# Altium PCB PCB_LC_LPF-16-25.PcbDoc
Units mm, origin at the board's own origin, x right, y up, seen from the top; angles counter-clockwise.
Board outline 180 x 65 mm, 2 copper layers (Top Layer, Bottom Layer); 40 components, 21 nets, 80 pads, 10 vias.
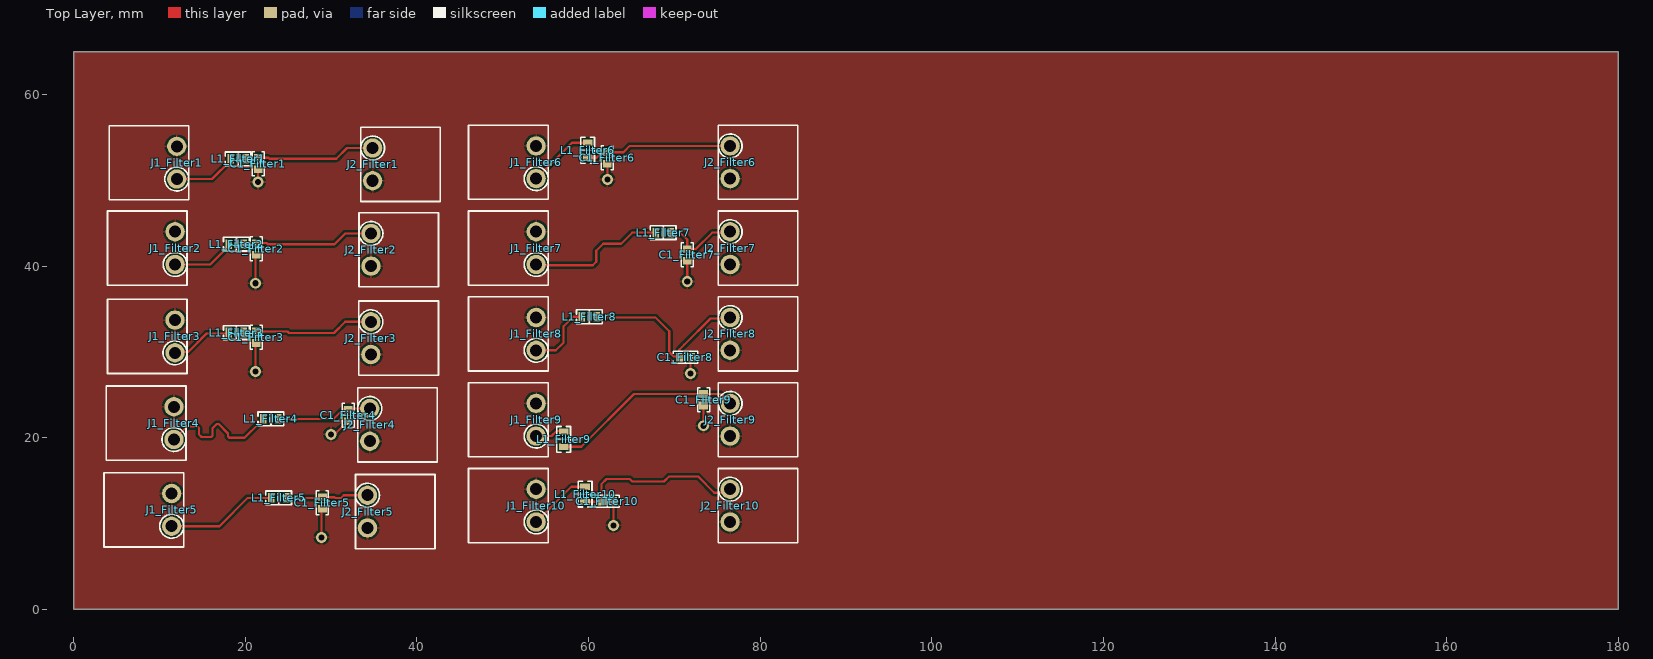
[diagram p0: Top Layer view]
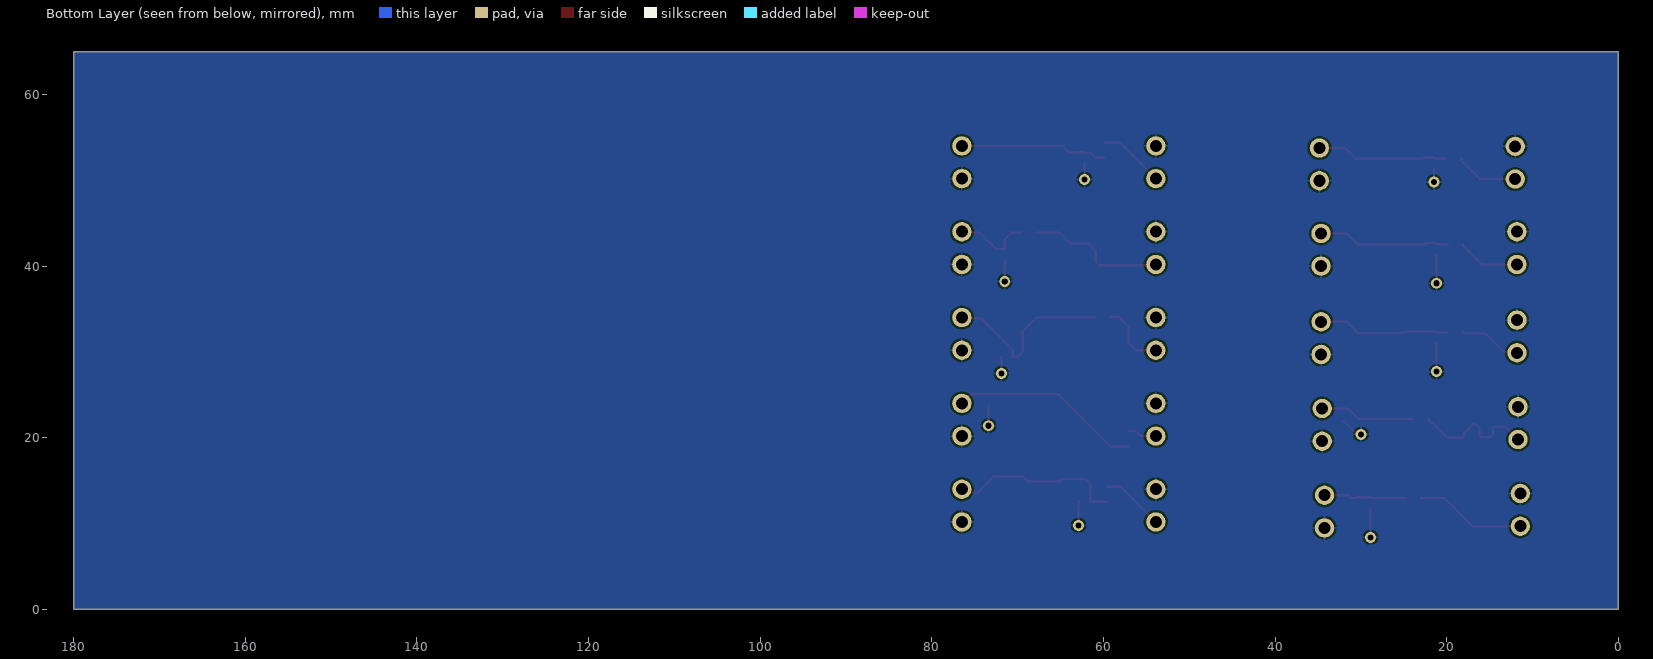
[diagram p1: Bottom Layer view, seen from below]
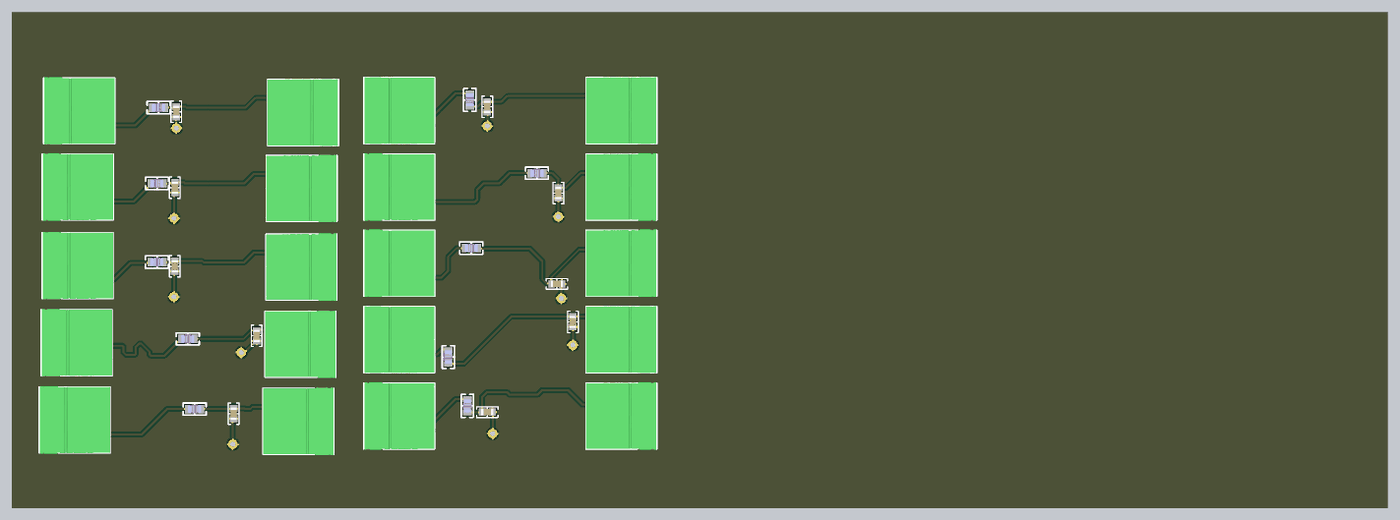
[diagram p2: 3D render of the assembled board from above, using the file's embedded part models]

## Layer stack, top to bottom
Top Solder: solder mask 0.0102, Solder Resist, Dk 3.5
Top Layer: signal copper 0.0356
Dielectric 1: dielectric 0.32, FR-4, Dk 4.8
Bottom Layer: signal copper 0.0356
Bottom Solder: solder mask 0.0102, Solder Resist, Dk 3.5

## Board outline
0,0 180,0 180,65 0,65

## Design rules (kind name [scope] priority, off if disabled: settings)
Clearance [All] p1: gap=0.254 ignorepadtopadclearanceinfootprint=FALSE except(0: Arc-Hole Track-Hole SMDPad-Hole THPad-Hole Via-Hole Fill-Hole Poly-Hole Region-Hole Text-Hole)
PolygonConnect [All] p1: connectstyle=Relief reliefconductorwidth=0.254 reliefentries=4 polygonreliefangle="90 Angle" airgapwidth=0.254
RoutingVias [All] p1: holewidth=0.711 width=1.27 viastyle="Through Hole" minholewidth=0.711 minwidth=1.27 maxholewidth=0.711 maxwidth=1.27
SolderMaskExpansion [All] p1: expansion=0.102 istentingtop=FALSE
Width [All] p1: maxlimit=0.254 minlimit=0.254 preferedwidth=0.254
30 further rules are at their usual default settings.

## Classes and differential pairs
component class Filter10: C1_Filter10 J1_Filter10 J2_Filter10 L1_Filter10
component class Filter9: C1_Filter9 J1_Filter9 J2_Filter9 L1_Filter9
component class Filter8: C1_Filter8 J1_Filter8 J2_Filter8 L1_Filter8
component class Filter7: C1_Filter7 J1_Filter7 J2_Filter7 L1_Filter7
component class Filter6: C1_Filter6 J1_Filter6 J2_Filter6 L1_Filter6
channel class PCB_LC_LPF-16-20: Filter1 Filter2 Filter3 Filter4 Filter5 Filter6 Filter7 Filter8 Filter9 Filter10
component class Filter5: C1_Filter5 J1_Filter5 J2_Filter5 L1_Filter5
component class Filter4: C1_Filter4 J1_Filter4 J2_Filter4 L1_Filter4
component class Filter3: C1_Filter3 J1_Filter3 J2_Filter3 L1_Filter3
component class Filter2: C1_Filter2 J1_Filter2 J2_Filter2 L1_Filter2
component class Filter1: C1_Filter1 J1_Filter1 J2_Filter1 L1_Filter1

## Components (designator, comment, footprint, x,y, rotation, side; value= is the part's Value field where it differs from the comment)
C1_Filter1 "10 µF" "CAP 0603_1608" 21.5,51.95 r90 top (schematic designator C1)
C1_Filter2 "10 µF" "CAP 0603_1608" 21.305,42.002 r90 top (schematic designator C1)
C1_Filter3 "10 µF" "CAP 0603_1608" 21.293,31.706 r90 top (schematic designator C1)
C1_Filter4 "10 µF" "CAP 0603_1608" 32,22.6 r90 top (schematic designator C1)
C1_Filter5 "10 µF" "CAP 0603_1608" 29.005,12.402 r90 top (schematic designator C1)
C1_Filter6 "10 µF" "CAP 0603_1608" 62.2,52.6 r90 top (schematic designator C1)
C1_Filter7 "10 µF" "CAP 0603_1608" 71.5,41.3 r90 top (schematic designator C1)
C1_Filter8 "10 µF" "CAP 0603_1608" 71.3,29.4 r180 top (schematic designator C1)
C1_Filter9 "10 µF" "CAP 0603_1608" 73.4,24.425 r90 top (schematic designator C1)
C1_Filter10 "10 µF" "CAP 0603_1608" 62.2,12.6 r180 top (schematic designator C1)
J1_Filter1 "OQ0232510000G" "FCI 06-381-2PIN" 8.726,52.049 r90 top (schematic designator J1)
J1_Filter2 "OQ0232510000G" "FCI 06-381-2PIN" 8.531,42.101 r90 top (schematic designator J1)
J1_Filter3 "OQ0232510000G" "FCI 06-381-2PIN" 8.519,31.805 r90 top (schematic designator J1)
J1_Filter4 "OQ0232510000G" "FCI 06-381-2PIN" 8.394,21.705 r90 top (schematic designator J1)
J1_Filter5 "OQ0232510000G" "FCI 06-381-2PIN" 8.131,11.601 r90 top (schematic designator J1)
J1_Filter6 "OQ0232510000G" "FCI 06-381-2PIN" 50.6,52.1 r90 top (schematic designator J1)
J1_Filter7 "OQ0232510000G" "FCI 06-381-2PIN" 50.6,42.1 r90 top (schematic designator J1)
J1_Filter8 "OQ0232510000G" "FCI 06-381-2PIN" 50.6,32.1 r90 top (schematic designator J1)
J1_Filter9 "OQ0232510000G" "FCI 06-381-2PIN" 50.6,22.1 r90 top (schematic designator J1)
J1_Filter10 "OQ0232510000G" "FCI 06-381-2PIN" 50.6,12.1 r90 top (schematic designator J1)
J2_Filter1 "OQ0232510000G" "FCI 06-381-2PIN" 38.15,51.85 r270 top (schematic designator J2)
J2_Filter2 "OQ0232510000G" "FCI 06-381-2PIN" 37.955,41.902 r270 top (schematic designator J2)
J2_Filter3 "OQ0232510000G" "FCI 06-381-2PIN" 37.943,31.606 r270 top (schematic designator J2)
J2_Filter4 "OQ0232510000G" "FCI 06-381-2PIN" 37.818,21.506 r270 top (schematic designator J2)
J2_Filter5 "OQ0232510000G" "FCI 06-381-2PIN" 37.555,11.402 r270 top (schematic designator J2)
J2_Filter6 "OQ0232510000G" "FCI 06-381-2PIN" 79.8,52.1 r270 top (schematic designator J2)
J2_Filter7 "OQ0232510000G" "FCI 06-381-2PIN" 79.8,42.1 r270 top (schematic designator J2)
J2_Filter8 "OQ0232510000G" "FCI 06-381-2PIN" 79.8,32.1 r270 top (schematic designator J2)
J2_Filter9 "OQ0232510000G" "FCI 06-381-2PIN" 79.8,22.1 r270 top (schematic designator J2)
J2_Filter10 "OQ0232510000G" "FCI 06-381-2PIN" 79.8,12.1 r270 top (schematic designator J2)
L1_Filter1 "47µH" "IND 0603_1608 RF WW" 19.175,52.5 r180 top (schematic designator L1)
L1_Filter2 "47µH" "IND 0603_1608 RF WW" 18.98,42.552 r180 top (schematic designator L1)
L1_Filter3 "47µH" "IND 0603_1608 RF WW" 18.968,32.256 r180 top (schematic designator L1)
L1_Filter4 "47µH" "IND 0603_1608 RF WW" 23,22.2 r180 top (schematic designator L1)
L1_Filter5 "47µH" "IND 0603_1608 RF WW" 23.9,13 r180 top (schematic designator L1)
L1_Filter6 "47µH" "IND 0603_1608 RF WW" 59.9,53.5 r90 top (schematic designator L1)
L1_Filter7 "47µH" "IND 0603_1608 RF WW" 68.7,43.9 r180 top (schematic designator L1)
L1_Filter8 "47µH" "IND 0603_1608 RF WW" 60.1,34.1 r180 top (schematic designator L1)
L1_Filter9 "47µH" "IND 0603_1608 RF WW" 57.1,19.825 r90 top (schematic designator L1)
L1_Filter10 "47µH" "IND 0603_1608 RF WW" 59.6,13.425 r90 top (schematic designator L1)

## Footprints (in the part's own frame and the unit in brackets; to place one, negate y for a bottom-side part, rotate by r counter-clockwise, add the part's x,y. Pads: shape width x height; smd on the part's side, far side on the other; paste and mask are expansions set on the pad)
"CAP 0603_1608" [mm] "Chip Capacitor, 2-Leads, Body 1.60x0.80mm, IPC Medium Density"
  rect 0.9x1 smd: 1(-0.675,0) 2(0.675,0)
  silkscreen extent -1.4,-0.7 1.4,0.7, body extent -0.8,-0.41 0.8,0.41, height 0.82
"FCI 06-381-2PIN" [mm] "FCI Pluggable Terminal Block"
  round 2.25 hole 1.4: 1(-1.905,-3.302) 2(1.905,-3.302)
  silkscreen extent -4.32,-4.7 4.32,4.57, body extent -4.4,-4.7 4.4,4.5, height 7.6
"IND 0603_1608 RF WW" [mm] "Chip Inductor, 2-Leads, Body 1.65x0.99mm, IPC Medium Density"
  rect 0.76x1.13 smd: 1(-0.875,0) 2(0.875,0)
  silkscreen extent -1.5,-0.8 1.5,0.8, body extent -0.84,-0.58 0.83,0.58, height 1

## Part data
C1_Filter1 C1_Filter2 C1_Filter3 C1_Filter4 C1_Filter5 C1_Filter6 C1_Filter7 C1_Filter8 C1_Filter9 C1_Filter10: library part MD0603BW106M100NHT-EM, "CAP CER 10UF 10V X5R 0603", Device Package="0603 (1608 Metric)", Manufacturer="Knowles Novacap", Operating Temperature="-55°C ~ 85°C", Supplier Part Number 1=1763-MD0603BW106M100NHT-EMCT-ND, Temperature Coefficient=X5R, Tolerance=±20%, Voltage - Rated=10V, Applications="Medical, Non-Critical", Capacitance="10 µF", ComponentLink1Description=Datasheet, ComponentLink1URL="https://mm.digikey.com/Volume0/opasdata/d220001/medias/docus/5546/MD Series R3.pdf", ComponentLink2Description="DigiKey Link", ComponentLink2URL=https://www.digikey.com/en/products/detail/knowles-novacap/MD0603BW106M100NHT-EM/21406876, lastupdated="02/11/2023 19:09:18", Lifecycle Status=Active, Minimum Order=1, Mounting Type="Surface Mount, MLCC", Package / Case="0603 (1608 Metric)", Packaging=TapeAndReel, Part Number=MD0603BW106M100NHT-EM, PartId=56748, price=0.24, Series=MD, Supplier 1=DigiKey
J1_Filter1 J1_Filter2 J1_Filter3 J1_Filter4 J1_Filter5 J1_Filter6 J1_Filter7 J1_Filter8 J1_Filter9 J1_Filter10 J2_Filter1 J2_Filter2 J2_Filter3 J2_Filter4 J2_Filter5 J2_Filter6 J2_Filter7 J2_Filter8 J2_Filter9 J2_Filter10: "TERM BLOCK HDR 2POS 90DEG 3.81MM", Color=Green, Current - UL=10A, Manufacturer="Amphenol Anytek", Operating Temperature="-40°C ~ 115°C", Supplier Part Number 1=609-3819-ND, Voltage - UL=300V, ComponentLink1Description=Datasheet, ComponentLink1URL=http://portal.fciconnect.com/Comergent//fci/drawing/oqxx32x100j0g.pdf, ComponentLink2Description="DigiKey Link", ComponentLink2URL=//digikey.com/product-detail/en/amphenol-anytek/OQ0232510000G/609-3819-ND/2261255, Contact Mating Finish=Tin, Header Orientation="90°, Right Angle", lastupdated="16/12/2019 19:14:30", Lifecycle Status=0, Minimum Order=1, Mounting Type="Through Hole", Number of Levels=1, Number of Positions=2, Packaging=Bulk, Part Number=OQ0232510000G, Part Status=Active, Pitch="0.150\" (3.81mm)", Positions Per Level=2, price=0.49, Series=06-381, Supplier 1=DigiKey, Termination Style=Solder, Type="Header, Male Pins, Shrouded (4 Side)"
L1_Filter1 L1_Filter2 L1_Filter3 L1_Filter4 L1_Filter5 L1_Filter6 L1_Filter7 L1_Filter8 L1_Filter9 L1_Filter10: library part L0603B470MPWFT, "INDUCTORPOWER LINE 0603 47H 20%", Current Rating (Amps)=90mA, DC Resistance (DCR)=5.8Ohm, Device Package="0603 (1608 Metric)", Frequency - Self Resonant=11MHz, Inductance Frequency - Test=2.52MHz, Manufacturer=KEMET, Operating Temperature="-40°C ~ 105°C", Supplier Part Number 1=399-17776-1-ND, Tolerance=±20%, ComponentLink1Description=Datasheet, ComponentLink1URL=https://api.kemet.com/component-edge/download/datasheet/L0603B470MPWFT.pdf, ComponentLink2Description="DigiKey Link", ComponentLink2URL=http://digikey.com/product-detail/en/kemet/L0603B470MPWFT/399-17776-1-ND/8601439, Height - Seated (Max)="0.035\" (0.90mm)", Inductance=47µH, lastupdated="06/09/2020 11:05:20", Lifecycle Status=Active, Material - Core=Ferrite, Minimum Order=1, Mounting Type="Surface Mount", Package / Case="0603 (1608 Metric)", Packaging=TapeAndReel, Part Number=L0603B470MPWFT, Part Status=Active, PartId=1309, price=0.14, Series=L-PWF, Shielding=Unshielded, Size / Dimension="0.063\" L x 0.031\" W (1.60mm x 0.80mm)", Supplier 1=DigiKey, Supplier Device Package="0603 (1608 Metric)", Type=Wirewound

## Via types
v1: diameter 1.27, hole 0.711, Top Layer to Bottom Layer, 10 vias

## Nets (pads, with @x,y where several pads share a name; then routed paths per layer and width w, separated by ;. In a path a pad name is that pad's centre, name@x,y a point inside that pad or via, vN(x,y) a via of type N, cw(c..) or ccw(c..) an arc to the next point about the centre after c; other vN are vias at no path point)
GND: C1_Filter1.1 C1_Filter2.1 C1_Filter3.1 C1_Filter4.1 C1_Filter5.1 C1_Filter6.1 C1_Filter7.1 C1_Filter8.1 C1_Filter9.1 C1_Filter10.1 J1_Filter1.2 J1_Filter2.2 J1_Filter3.2 J1_Filter4.2 J1_Filter5.2 J1_Filter6.2 J1_Filter7.2 J1_Filter8.2 J1_Filter9.2 J1_Filter10.2 J2_Filter1.2 J2_Filter2.2 J2_Filter3.2 J2_Filter4.2 J2_Filter5.2 J2_Filter6.2 J2_Filter7.2 J2_Filter8.2 J2_Filter9.2 J2_Filter10.2 | length 25.6
  Top Layer w0.254: v1(21.188,27.704) 21.188,30.926 C1_Filter3.1 ; v1(21.2,38) 21.2,41.222 C1_Filter2.1 ; v1(21.5,49.8) C1_Filter1.1 ; v1(28.9,8.4) 28.9,11.622 C1_Filter5.1 ; v1(30,20.4) 30.194,20.594 30.619,20.594 31.95,21.925 C1_Filter4.1 ; v1(62.2,50.1) C1_Filter6.1 ; C1_Filter10.1 62.9,12.575 v1(62.9,9.8) ; v1(71.5,38.2) C1_Filter7.1 ; v1(71.9,27.5) 71.9,29.325 C1_Filter8.1 ; v1(73.4,21.4) C1_Filter9.1
IN_Filter1: J1_Filter1.1 L1_Filter1.2 | length 7.4
  Top Layer w0.254: J1_Filter1.1 16.129,50.144 18.3,52.315 L1_Filter1.2
IN_Filter2: J1_Filter2.1 L1_Filter2.2 | length 7.4
  Top Layer w0.254: J1_Filter2.1 15.934,40.196 18.105,42.367 L1_Filter2.2
IN_Filter3: J1_Filter3.1 L1_Filter3.2 | length 7.2
  Top Layer w0.254: J1_Filter3.1 11.898,29.977 13.327,29.977 15.5,32.15 17.987,32.15 L1_Filter3.2
IN_Filter4: J1_Filter4.1 L1_Filter4.2 | length 15
  Top Layer w0.254: J1_Filter4.1 13.196,21.3 14.451,21.3 14.6,21.151 14.6,20.4 14.9,20.1 16.051,20.1 16.2,20.249 16.2,21.1 16.695,21.595 16.905,21.595 18,20.5 18,20.149 18.149,20 19.925,20 21.687,21.762 21.872,21.762 22.125,22.015 L1_Filter4.2
IN_Filter5: J1_Filter5.1 L1_Filter5.2 | length 13.1
  Top Layer w0.254: J1_Filter5.1 16.996,9.696 20.3,13 L1_Filter5.2 L1_Filter5.2@23.025,13.185
IN_Filter6: J1_Filter6.1 L1_Filter6.2 | length 7.7
  Top Layer w0.254: J1_Filter6.1 56.1,52.393 56.1,52.4 58.075,54.375 L1_Filter6.2
IN_Filter7: J1_Filter7.1 L1_Filter7.2 | length 16.3
  Top Layer w0.254: J1_Filter7.1 53.997,40.1 60.5,40.1 60.9,40.5 60.9,41.8 61.7,42.6 63.8,42.6 65.1,43.9 L1_Filter7.2
IN_Filter8: J1_Filter8.1 L1_Filter8.2 | length 8.1
  Top Layer w0.254: J1_Filter8.1 56.195,30.195 57.1,31.1 57.1,33 58.2,34.1 L1_Filter8.2
IN_Filter9: J1_Filter9.1 L1_Filter9.2 | length 3.5
  Top Layer w0.254: J1_Filter9.1 55.695,20.195 56.303,20.803 56.997,20.803 L1_Filter9.2
IN_Filter10: J1_Filter10.1 L1_Filter10.2 | length 7.4
  Top Layer w0.254: J1_Filter10.1 58.007,14.3 L1_Filter10.2
OUT_Filter1: C1_Filter1.2 J2_Filter1.1 L1_Filter1.1 | length 15.4
  Top Layer w0.254: L1_Filter1.1 21.375,52.5 C1_Filter1.2 22.7,52.625 22.825,52.5 30.6,52.5 31.855,53.755 J2_Filter1.1
OUT_Filter2: C1_Filter2.2 J2_Filter2.1 L1_Filter2.1 | length 15.4
  Top Layer w0.254: L1_Filter2.1 21.18,42.552 C1_Filter2.2 22.505,42.677 22.63,42.552 30.405,42.552 31.66,43.807 J2_Filter2.1
OUT_Filter3: C1_Filter3.2 J2_Filter3.1 L1_Filter3.1 | length 15.5
  Top Layer w0.254: L1_Filter3.1 21.168,32.256 C1_Filter3.2 24.919,32.381 25.1,32.2 30.337,32.2 31.648,33.511 J2_Filter3.1
OUT_Filter4: C1_Filter4.2 J2_Filter4.1 L1_Filter4.1 | length 11.1
  Top Layer w0.254: L1_Filter4.1 30.312,22.2 31.523,23.411 J2_Filter4.1
OUT_Filter5: C1_Filter5.2 J2_Filter5.1 L1_Filter5.1 | length 9.7
  Top Layer w0.254: L1_Filter5.1 28.928,13 C1_Filter5.2 30.423,13.077 30.5,13 31.175,13 31.482,13.307 J2_Filter5.1
OUT_Filter6: C1_Filter6.2 J2_Filter6.1 L1_Filter6.1 | length 17.2
  Top Layer w0.254: L1_Filter6.1 60.925,52.625 61.468,53.168 62.093,53.168 C1_Filter6.2 64.075,53.275 64.805,54.005 J2_Filter6.1
OUT_Filter7: C1_Filter7.2 J2_Filter7.1 L1_Filter7.1 | length 9.2
  Top Layer w0.254: L1_Filter7.1 70.7,43.9 71.5,43.1 C1_Filter7.2 72.475,41.975 74.4,43.9 76.393,43.9 J2_Filter7.1
OUT_Filter8: C1_Filter8.2 J2_Filter8.1 L1_Filter8.1 | length 21.4
  Top Layer w0.254: L1_Filter8.1 61.05,34.025 67.775,34.025 69.4,32.4 69.4,30 69.943,29.457 70.568,29.457 C1_Filter8.2 70.573,29.452 70.573,30.273 71.144,30.844 74.206,33.906 76.399,33.906 J2_Filter8.1
OUT_Filter9: C1_Filter9.2 J2_Filter9.1 L1_Filter9.1 | length 22.4
  Top Layer w0.254: L1_Filter9.1 59.15,18.95 65.3,25.1 C1_Filter9.2 75.403,25.1 J2_Filter9.1
OUT_Filter10: C1_Filter10.2 J2_Filter10.1 L1_Filter10.1 | length 20.5
  Top Layer w0.254: L1_Filter10.1 61.475,12.55 C1_Filter10.2 61.525,14.625 62.1,15.2 64.8,15.2 65.1,14.9 68.8,14.9 69.4,15.5 72.749,15.5 74.649,13.6 75.045,13.6 75.068,13.623 76.116,13.623 J2_Filter10.1

## Polygon pours and split planes (outlines as drawn)
GND on Bottom Layer "BOT_GND" (solid, pour order 1): 0,0 180,0 180,65 0,65
GND on Top Layer "GND_L01_P002" (solid, pour order 2): 0,0 180,0 180,65 0,65

## Silkscreen, mask and mechanical layers (free items; w line width, h text height)
Top Overlay:
Mechanical 1:
  lines w0.254: 0,0 0,65